# Altium PCB ALio MCU Breakout.PcbDoc
Units mm, origin at the board's own origin, x right, y up, seen from the top; angles counter-clockwise.
Board outline 23.11 x 61.85 mm, 2 copper layers (Top Layer, Bottom Layer); 2 components, 0 nets, 622 pads, 9 vias.
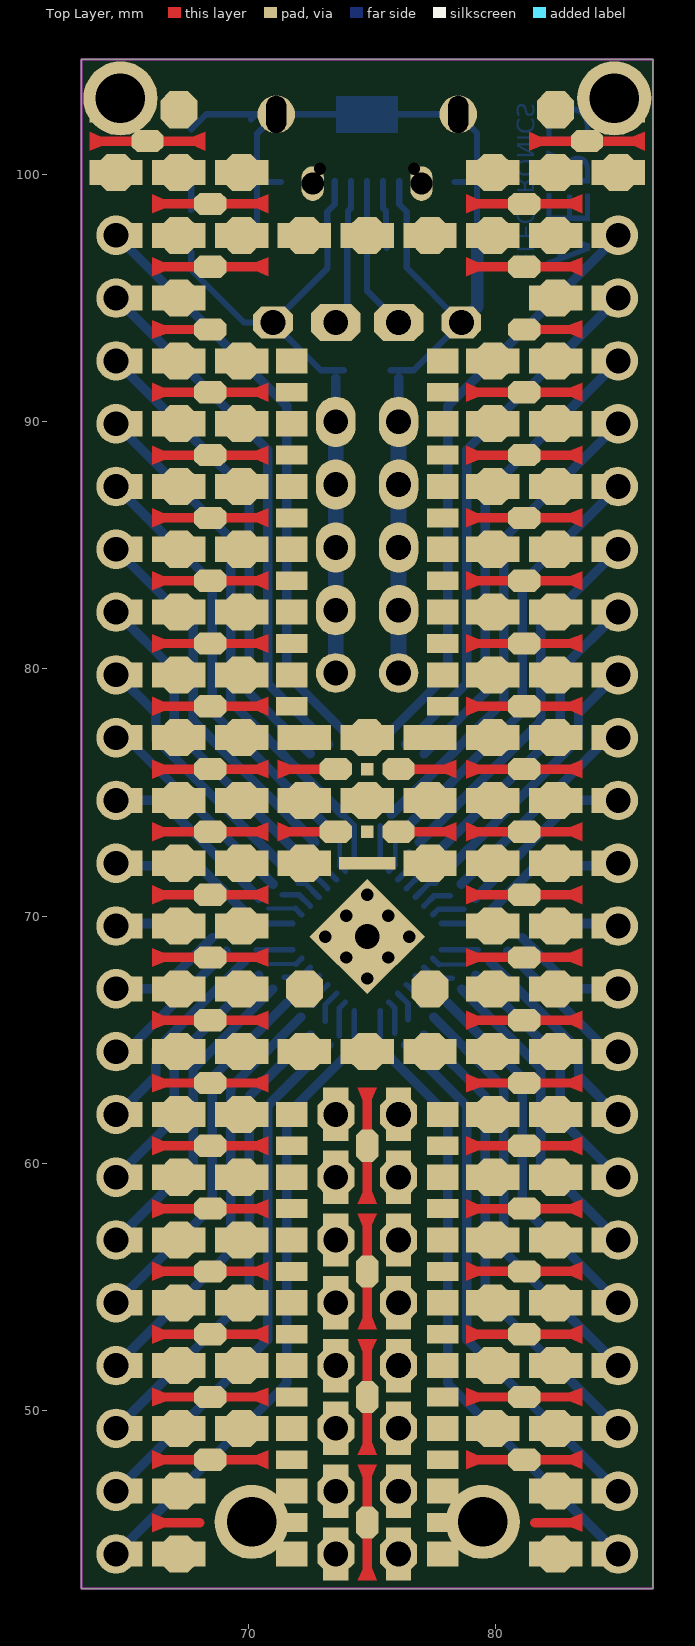
[diagram p0: Top Layer view]
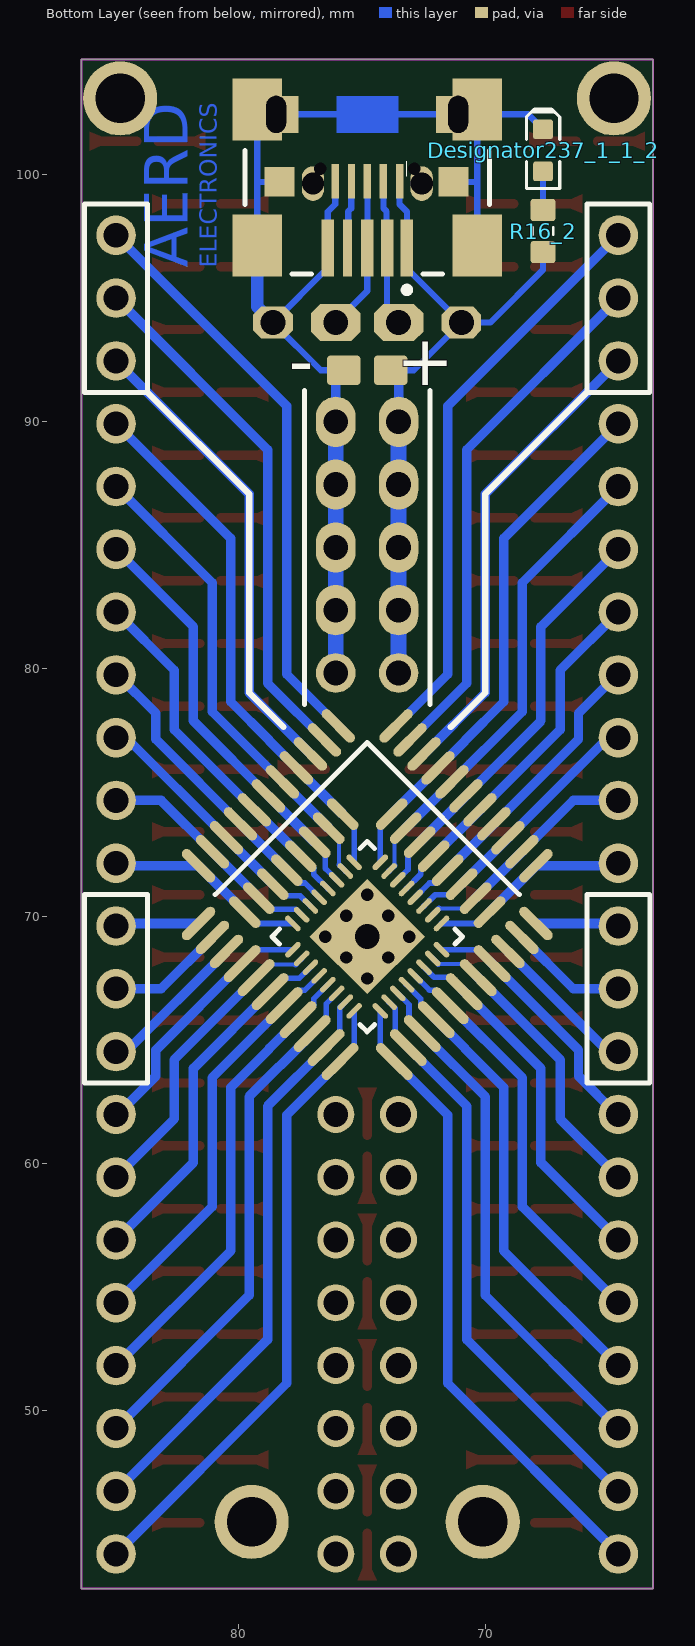
[diagram p1: Bottom Layer view, seen from below]

## Layer stack, top to bottom
Top Layer: signal copper 0.0356
Dielectric: dielectric 0.32, FR-4, Dk 4.8
Bottom Layer: signal copper 0.0356

## Board outline
86.36,104.648 63.246,104.648 63.246,42.799 86.36,42.799

## Design rules (kind name [scope] priority, off if disabled: settings)
Clearance [All] p1: gap=0.254
ComponentClearance [All] p1 off: gap=0.254 collisioncheckmode=3 verticalgap=0.254 showdistances=FALSE
HoleToHoleClearance [All] p1 off: gap=0.254 allowstackedmicrovias=TRUE
MinimumSolderMaskSliver [All] p1 off: minsoldermaskwidth=0.254
PolygonConnect [All] p1: connectstyle=Relief reliefconductorwidth=0.254 reliefentries=4 polygonreliefangle="90 Angle"
RoutingVias [All] p1: holewidth=0.711 width=1.27 viastyle="Through Hole" minholewidth=0.711 minwidth=1.27 maxholewidth=0.711 maxwidth=1.27
SilkToSilkClearance [All] p1 off: silktosilkclearance=0.254
SilkscreenOverComponentPads [All] p1: minsilkscreentomaskgap=0.254
SolderMaskExpansion [All] p1: expansion=0.102
Width [All] p1: maxlimit=1.27 minlimit=0.254 preferedwidth=0.508
23 further rules are at their usual default settings.

## Components (designator, comment, footprint, x,y, rotation, side; value= is the part's Value field where it differs from the comment)
Designator237_1_1_2 "Comment" LED-0603-RED 67.691,100.973 r90 bottom
R16_2 "Thick Film" 0603ESDA 67.691,97.71 r270 bottom (schematic designator R13)

## Footprints (in the part's own frame and the unit in brackets; to place one, negate y for a bottom-side part, rotate by r counter-clockwise, add the part's x,y. Pads: shape width x height; smd on the part's side, far side on the other; paste and mask are expansions set on the pad)
0603ESDA [mm] "Chip ESD suppressor, Body 1.6x0.8mm, 0603, IPC Medium Density"
  round 0.254 on Mech14: 0(0,0)
  rrect25% 0.9x1 smd: 1(-0.85,0) 2(0.85,0)
  Top Layer pour cut-out: -0.4,0.6 0.4,0.6 0.4,-0.6 -0.4,-0.6
  silkscreen extent -0.15,-0.41 0.15,0.41, body extent -0.85,-0.45 0.85,0.45, height 0.79
LED-0603-RED [mm]
  round 0.254 on Mech14: 0(0,0)
  rrect25% 0.8x0.8 smd: A(-0.85,0) K(0.85,0)
  Top Layer pour cut-out: -0.5,0.5 0.5,0.5 0.5,-0.5 -0.5,-0.5
  silkscreen extent -1.55,-0.67 1.68,0.67, body extent -0.8,-0.4 0.8,0.4, height 0.75

## Part data
R16_2: library part RES_240R_0805_1%, "Resistor SMD chip 240 Ohm 0.125W 1% 0805"

## Free pads (board coordinates)
  round 0.254 on Mech14: 0(74.803,92.078)
  round 1.6 hole 1: 1(64.643,69.596) 1(64.643,72.136) 1(73.533,79.832) 1(84.963,69.596) 1(84.963,72.136) 2(64.643,67.056) 2(64.643,74.676) 2(76.073,79.832) 2(84.963,67.056) 2(84.963,74.676) 3(64.643,64.516) 3(64.643,77.216) 3(84.963,64.516) 3(84.963,77.216) 4(64.643,61.976) 4(64.643,79.756) 4(84.963,61.976) 4(84.963,79.756) 5(64.643,59.436) 5(64.643,82.296) 5(84.963,59.436) 5(84.963,82.296) 6(64.643,56.896) 6(64.643,84.836) 6(84.963,56.896) 6(84.963,84.836) 7(64.643,54.356) 7(64.643,87.376) 7(84.963,54.356) 7(84.963,87.376) 8(64.643,51.816) 8(64.643,89.916) 8(84.963,51.816) 8(84.963,89.916) 9(64.643,49.276) 9(64.643,92.456) 9(84.963,49.276) 9(84.963,92.456) 10(64.643,46.736) 10(64.643,94.996) 10(84.963,46.736) 10(84.963,94.996) 11(64.643,44.196) 11(64.643,97.536) 11(84.963,44.196) 11(84.963,97.536)
  oct 1.5x1.5 smd: 1(64.643,100.076) 1(67.183,102.616) 1(69.723,49.276) 1(69.723,51.816) 1(69.723,54.356) 1(69.723,56.896) 1(69.723,59.436) 1(69.723,61.976) 1(69.723,64.516) 1(69.723,67.056) 1(69.723,69.596) 1(69.723,72.136) 1(69.723,74.676) 1(69.723,77.216) 1(69.723,79.756) 1(69.723,82.296) 1(69.723,84.836) 1(69.723,87.376) 1(69.723,89.916) 1(69.723,92.456) 1(69.723,97.536) 1(69.723,100.076) 1(73.533,46.736) 1(73.533,51.816) 1(73.533,56.896) 1(73.533,61.976) 1(74.803,64.516) 1(74.803,74.676) 1(74.803,77.216) 1(74.803,97.536) 1(76.073,46.736) 1(76.073,51.816) 1(76.073,56.896) 1(76.073,61.976) 1(82.423,44.196) 1(82.423,46.736) 1(82.423,49.276) 1(82.423,51.816) 1(82.423,54.356) 1(82.423,56.896) 1(82.423,59.436) 1(82.423,61.976) 1(82.423,64.516) 1(82.423,67.056) 1(82.423,69.596) 1(82.423,72.136) 1(82.423,74.676) 1(82.423,77.216) 1(82.423,79.756) 1(82.423,82.296) 1(82.423,84.836) 1(82.423,87.376) 1(82.423,89.916) 1(82.423,92.456) 1(82.423,94.996) 1(82.423,97.536) 1(82.423,100.076) 1(84.963,100.076) 1(84.963,102.616) 2(64.643,102.616) 2(67.183,44.196) 2(67.183,46.736) 2(67.183,49.276) 2(67.183,51.816) 2(67.183,54.356) 2(67.183,56.896) 2(67.183,59.436) 2(67.183,61.976) 2(67.183,64.516) 2(67.183,67.056) 2(67.183,69.596) 2(67.183,72.136) 2(67.183,74.676) 2(67.183,77.216) 2(67.183,79.756) 2(67.183,82.296) 2(67.183,84.836) 2(67.183,87.376) 2(67.183,89.916) 2(67.183,92.456) 2(67.183,94.996) 2(67.183,97.536) 2(67.183,100.076) 2(72.263,64.516) 2(72.263,67.056) 2(72.263,72.136) 2(72.263,74.676) 2(72.263,97.536) 2(73.533,44.196) 2(73.533,49.276) 2(73.533,54.356) 2(73.533,59.436) 2(76.073,44.196) 2(76.073,49.276) 2(76.073,54.356) 2(76.073,59.436) 2(77.343,64.516) 2(77.343,67.056) 2(77.343,72.136) 2(77.343,74.676) 2(77.343,97.536) 2(79.883,49.276) 2(79.883,51.816) 2(79.883,54.356) 2(79.883,56.896) 2(79.883,59.436) 2(79.883,61.976) 2(79.883,64.516) 2(79.883,67.056) 2(79.883,69.596) 2(79.883,72.136) 2(79.883,74.676) 2(79.883,77.216) 2(79.883,79.756) 2(79.883,82.296) 2(79.883,84.836) 2(79.883,87.376) 2(79.883,89.916) 2(79.883,92.456) 2(79.883,97.536) 2(79.883,100.076) 2(82.423,102.616)
  rect 2.159x1.016 smd: 1(64.643,100.076) 1(69.723,49.276) 1(69.723,51.816) 1(69.723,54.356) 1(69.723,56.896) 1(69.723,59.436) 1(69.723,61.976) 1(69.723,64.516) 1(69.723,67.056) 1(69.723,69.596) 1(69.723,72.136) 1(69.723,74.676) 1(69.723,77.216) 1(69.723,79.756) 1(69.723,82.296) 1(69.723,84.836) 1(69.723,87.376) 1(69.723,89.916) 1(69.723,92.456) 1(69.723,97.536) 1(69.723,100.076) 1(74.803,64.516) 1(74.803,74.676) 1(74.803,77.216) 1(74.803,97.536) 1(82.423,44.196) 1(82.423,46.736) 1(82.423,49.276) 1(82.423,51.816) 1(82.423,54.356) 1(82.423,56.896) 1(82.423,59.436) 1(82.423,61.976) 1(82.423,64.516) 1(82.423,67.056) 1(82.423,69.596) 1(82.423,72.136) 1(82.423,74.676) 1(82.423,77.216) 1(82.423,79.756) 1(82.423,82.296) 1(82.423,84.836) 1(82.423,87.376) 1(82.423,89.916) 1(82.423,92.456) 1(82.423,94.996) 1(82.423,97.536) 1(82.423,100.076) 1(84.963,100.076) 1(84.963,102.616) 2(64.643,102.616) 2(67.183,44.196) 2(67.183,46.736) 2(67.183,49.276) 2(67.183,51.816) 2(67.183,54.356) 2(67.183,56.896) 2(67.183,59.436) 2(67.183,61.976) 2(67.183,64.516) 2(67.183,67.056) 2(67.183,69.596) 2(67.183,72.136) 2(67.183,74.676) 2(67.183,77.216) 2(67.183,79.756) 2(67.183,82.296) 2(67.183,84.836) 2(67.183,87.376) 2(67.183,89.916) 2(67.183,92.456) 2(67.183,94.996) 2(67.183,97.536) 2(67.183,100.076) 2(72.263,64.516) 2(72.263,72.136) 2(72.263,74.676) 2(72.263,77.216) 2(72.263,97.536) 2(77.343,64.516) 2(77.343,72.136) 2(77.343,74.676) 2(77.343,77.216) 2(77.343,97.536) 2(79.883,49.276) 2(79.883,51.816) 2(79.883,54.356) 2(79.883,56.896) 2(79.883,59.436) 2(79.883,61.976) 2(79.883,64.516) 2(79.883,67.056) 2(79.883,69.596) 2(79.883,72.136) 2(79.883,74.676) 2(79.883,77.216) 2(79.883,79.756) 2(79.883,82.296) 2(79.883,84.836) 2(79.883,87.376) 2(79.883,89.916) 2(79.883,92.456) 2(79.883,97.536) 2(79.883,100.076)
  round 3 hole 2: 1(64.821,103.073) 1(70.129,45.491) 1(79.477,45.491) 1(84.797,103.073)
  oval 0.4x1.65 smd far side rot 45: 1(69.853,70.159) 2(70.419,70.725) 3(70.985,71.291) 4(71.55,71.856) 5(72.116,72.422) 6(72.682,72.988) 7(73.247,73.553) 8(73.813,74.119) 17(79.753,68.179) 18(79.187,67.614) 19(78.621,67.048) 20(78.056,66.482) 21(77.49,65.917) 22(76.924,65.351) 23(76.359,64.785) 24(75.793,64.22)
  oct 1.6x1.3 hole 1: 1(70.993,94.007) 4(78.613,94.007)
  rect 1.8x1.5 smd far side: 1(71.123,102.429) 1(78.487,102.429)
  rect 0.5x2.3 smd far side: 1(73.198,97.028) 2(73.998,97.028) 3(74.798,97.028) 5(76.398,97.028)
  rect 0.305x1.4 smd far side: 1(73.495,99.729) 2(74.145,99.729) 3(74.795,99.729) 5(76.095,99.729)
  rect 1.016x2.159 smd: 1(73.533,46.736) 1(73.533,51.816) 1(73.533,56.896) 1(73.533,61.976) 1(76.073,46.736) 1(76.073,51.816) 1(76.073,56.896) 1(76.073,61.976) 2(73.533,44.196) 2(73.533,49.276) 2(73.533,54.356) 2(73.533,59.436) 2(76.073,44.196) 2(76.073,49.276) 2(76.073,54.356) 2(76.073,59.436)
  oval 0.4x1.75 smd far side rot 135: 1(73.636,64.042) 2(73.071,64.608) 3(72.505,65.174) 4(71.939,65.739) 5(71.374,66.305) 6(70.808,66.871) 7(70.242,67.437) 8(69.676,68.002) 9(69.111,68.568) 10(68.545,69.134) 11(67.979,69.699) 23(75.97,77.69) 24(76.535,77.124) 25(77.101,76.558) 26(77.667,75.993) 27(78.232,75.427) 28(78.798,74.861) 29(79.364,74.295) 30(79.93,73.73) 31(80.495,73.164) 32(81.061,72.598) 33(81.627,72.033)
  rrect25% 1.35x1.2 smd far side: 1(73.853,92.078) 2(75.753,92.078)
  rect 2.286x0.508 smd: 1(74.803,72.136)
  rect 0.508x0.508 smd: 1(74.803,73.406) 1(74.803,75.946)
  round 1.5 hole 1: 1(76.073,61.976) 2(73.533,61.976) 3(76.073,59.436) 4(73.533,59.436) 5(76.073,56.896) 6(73.533,56.896) 7(76.073,54.356) 8(73.533,54.356) 9(76.073,51.816) 10(73.533,51.816) 11(76.073,49.276) 12(73.533,49.276) 13(76.073,46.736) 14(73.533,46.736) 15(76.073,44.196) 16(73.533,44.196)
  oval 0.229x0.8 smd far side rot 45: 1(77.808,68.639) 2(77.455,68.285) 3(77.101,67.932) 4(76.748,67.578) 5(76.394,67.225) 6(76.04,66.871) 7(75.687,66.518) 8(75.333,66.164) 17(71.798,69.7) 18(72.151,70.053) 19(72.505,70.407) 20(72.858,70.76) 21(73.212,71.114) 22(73.566,71.467) 23(73.919,71.821) 24(74.273,72.174)
  rect 1.524x1.016 smd: 2(64.96,44.196) 2(64.96,46.736) 2(64.96,49.276) 2(64.96,51.816) 2(64.96,54.356) 2(64.96,56.896) 2(64.96,59.436) 2(64.96,61.976) 2(64.96,64.516) 2(64.96,67.056) 2(64.96,69.596) 2(64.96,72.136) 2(64.96,74.676) 2(64.96,77.216) 2(64.96,79.756) 2(64.96,82.296) 2(64.96,84.836) 2(64.96,87.376) 2(64.96,89.916) 2(64.96,92.456) 2(64.96,94.996) 2(64.96,97.536) 2(84.645,44.196) 2(84.645,46.736) 2(84.645,49.276) 2(84.645,51.816) 2(84.645,54.356) 2(84.645,56.896) 2(84.645,59.436) 2(84.645,61.976) 2(84.645,64.516) 2(84.645,67.056) 2(84.645,69.596) 2(84.645,72.136) 2(84.645,74.676) 2(84.645,77.216) 2(84.645,79.756) 2(84.645,82.296) 2(84.645,84.836) 2(84.645,87.376) 2(84.645,89.916) 2(84.645,92.456) 2(84.645,94.996) 2(84.645,97.536)
  rect 1.27x1.016 smd: 2(71.755,44.196) 2(71.755,46.736) 2(71.755,49.276) 2(71.755,51.816) 2(71.755,54.356) 2(71.755,56.896) 2(71.755,59.436) 2(71.755,61.976) 2(71.755,79.756) 2(71.755,82.296) 2(71.755,84.836) 2(71.755,87.376) 2(71.755,89.916) 2(71.755,92.456) 2(77.851,44.196) 2(77.851,46.736) 2(77.851,49.276) 2(77.851,51.816) 2(77.851,54.356) 2(77.851,56.896) 2(77.851,59.436) 2(77.851,61.976) 2(77.851,79.756) 2(77.851,82.296) 2(77.851,84.836) 2(77.851,87.376) 2(77.851,89.916) 2(77.851,92.456)
  rect 1.27x0.762 smd: 2(71.755,45.466) 2(71.755,48.006) 2(71.755,50.546) 2(71.755,53.086) 2(71.755,55.626) 2(71.755,58.166) 2(71.755,60.706) 2(71.755,78.486) 2(71.755,81.026) 2(71.755,83.566) 2(71.755,86.106) 2(71.755,88.646) 2(71.755,91.186) 2(77.851,45.466) 2(77.851,48.006) 2(77.851,50.546) 2(77.851,53.086) 2(77.851,55.626) 2(77.851,58.166) 2(77.851,60.706) 2(77.851,78.486) 2(77.851,81.026) 2(77.851,83.566) 2(77.851,86.106) 2(77.851,88.646) 2(77.851,91.186)
  oct 2x1.5 hole 1: 2(73.533,94.007) 3(76.073,94.007)
  rrect50% 1.5x1.5 smd: 2(74.803,69.169)
  oct 1.3x0.9 smd: 3(65.913,101.346) 3(68.453,48.006) 3(68.453,50.546) 3(68.453,53.086) 3(68.453,55.626) 3(68.453,58.166) 3(68.453,60.706) 3(68.453,63.246) 3(68.453,65.786) 3(68.453,68.326) 3(68.453,70.866) 3(68.453,73.406) 3(68.453,75.946) 3(68.453,78.486) 3(68.453,81.026) 3(68.453,83.566) 3(68.453,86.106) 3(68.453,88.646) 3(68.453,91.186) 3(68.453,93.726) 3(68.453,96.266) 3(68.453,98.806) 3(73.533,73.406) 3(73.533,75.946) 3(76.073,73.406) 3(76.073,75.946) 3(81.153,48.006) 3(81.153,50.546) 3(81.153,53.086) 3(81.153,55.626) 3(81.153,58.166) 3(81.153,60.706) 3(81.153,63.246) 3(81.153,65.786) 3(81.153,68.326) 3(81.153,70.866) 3(81.153,73.406) 3(81.153,75.946) 3(81.153,78.486) 3(81.153,81.026) 3(81.153,83.566) 3(81.153,86.106) 3(81.153,88.646) 3(81.153,91.186) 3(81.153,93.726) 3(81.153,96.266) 3(81.153,98.806) 3(83.693,101.346)
  oval 1.6x2.032 hole 1: 3(73.533,82.372) 4(76.073,82.372) 5(73.533,84.912) 6(76.073,84.912) 7(73.533,87.452) 8(76.073,87.452) 9(73.533,89.992) 10(76.073,89.992)
  oct 0.9x1.3 smd: 3(74.803,45.466) 3(74.803,50.546) 3(74.803,55.626) 3(74.803,60.706)
  rect 0.279x1.4 smd far side: 4(75.445,99.729)
  rect 0.35x2.3 smd far side: 4(75.598,97.028)
  rect 2x2.5 smd far side: 6(79.248,97.128) 7(79.248,102.628) 8(70.348,97.128) 9(70.348,102.628)
  oval 0.229x0.8 smd far side rot 135: 9(74.273,66.164) 10(73.919,66.518) 11(73.566,66.871) 12(73.212,67.225) 13(72.858,67.578) 14(72.505,67.932) 15(72.151,68.285) 16(71.798,68.639) 25(75.333,72.174) 26(75.687,71.821) 27(76.04,71.467) 28(76.394,71.114) 29(76.748,70.76) 30(77.101,70.407) 31(77.455,70.053) 32(77.808,69.7)
  oval 0.4x1.65 smd far side rot 135: 9(75.793,74.119) 10(76.359,73.553) 11(76.924,72.988) 12(77.49,72.422) 13(78.056,71.856) 14(78.621,71.291) 15(79.187,70.725) 16(79.753,70.159) 25(73.813,64.22) 26(73.247,64.785) 27(72.682,65.351) 28(72.116,65.917) 29(71.55,66.482) 30(70.985,67.048) 31(70.419,67.614) 32(69.853,68.179)
  oval 0.4x1.75 smd far side rot 45: 12(67.979,72.033) 13(68.545,72.598) 14(69.111,73.164) 15(69.676,73.73) 16(70.242,74.295) 17(70.808,74.861) 18(71.374,75.427) 19(71.939,75.993) 20(72.505,76.558) 21(73.071,77.124) 22(73.636,77.69) 34(81.627,69.699) 35(81.061,69.134) 36(80.495,68.568) 37(79.93,68.002) 38(79.364,67.437) 39(78.798,66.871) 40(78.232,66.305) 41(77.667,65.739) 42(77.101,65.174) 43(76.535,64.608) 44(75.97,64.042)
  rect 3.3x3.3 smd far side rot 135: 33(74.803,69.169)
  rect 3.3x3.3 smd rot 45: 33(74.803,69.169)
  oval 0.9x1.4 hole 0.9 unplated: MH1(76.998,99.628) MH2(72.598,99.628)
  rect 0x0 smd: P1(76.131,99.689) P2(75.481,99.689) P3(74.831,99.689) P4(74.181,99.689) P5(73.531,99.689)
  round 1.524 hole 0.8 slot 1.5 at 90 deg: ""(71.123,102.429) ""(78.487,102.429)
  rect 1.2x1.2 smd far side: ""(71.313,99.697) ""(78.348,99.697)
  round 0.3 hole 0.5: ""(72.895,100.229) ""(76.695,100.229)

## Via types
v1: diameter 0.66, hole 0.5, Top Layer to Bottom Layer, tented top, 8 vias
v2: diameter 1.2, hole 1, Top Layer to Bottom Layer, tented top, 1 vias

## Nets (pads, with @x,y where several pads share a name; then routed paths per layer and width w, separated by ;. In a path a pad name is that pad's centre, name@x,y a point inside that pad or via, vN(x,y) a via of type N, cw(c..) or ccw(c..) an arc to the next point about the centre after c; other vN are vias at no path point)
pads on no net: Designator237_1_1_2.0 Designator237_1_1_2.A Designator237_1_1_2.K R16_2.0 R16_2.1 R16_2.2
copper on no net: | length 928.1
  Top Layer w0.381: 63.765,101.346 65.486,101.346 ; 66.305,45.466 68.026,45.466 ; 66.305,48.006 68.026,48.006 ; 66.305,50.546 68.026,50.546 ; 66.305,53.086 68.026,53.086 ; 66.305,55.626 68.026,55.626 ; 66.305,58.166 68.026,58.166 ; 66.305,60.706 68.026,60.706 ; 66.305,63.246 68.026,63.246 ; 66.305,65.786 68.026,65.786 ; 66.305,68.326 68.026,68.326 ; 66.305,70.866 68.026,70.866 ; 66.305,73.406 68.026,73.406 ; 66.305,75.946 68.026,75.946 ; 66.305,78.486 68.026,78.486 ; 66.305,81.026 68.026,81.026 ; 66.305,83.566 68.026,83.566 ; 66.305,86.106 68.026,86.106 ; 66.305,88.646 68.026,88.646 ; 66.305,91.186 68.026,91.186 ; 66.305,93.726 68.026,93.726 ; 66.305,96.266 68.026,96.266 ; 66.305,98.806 68.026,98.806 ; 66.34,101.346 68.061,101.346 ; 68.88,45.466 70.601,45.466 ; 68.88,48.006 70.601,48.006 ; 68.88,50.546 70.601,50.546 ; 68.88,53.086 70.601,53.086 ; 68.88,55.626 70.601,55.626 ; 68.88,58.166 70.601,58.166 ; 68.88,60.706 70.601,60.706 ; 68.88,63.246 70.601,63.246 ; 68.88,65.786 70.601,65.786 ; 68.88,68.326 70.601,68.326 ; 68.88,70.866 70.601,70.866 ; 68.88,73.406 70.601,73.406 ; 68.88,75.946 70.601,75.946 ; 68.88,78.486 70.601,78.486 ; 68.88,81.026 70.601,81.026 ; 68.88,83.566 70.601,83.566 ; 68.88,86.106 70.601,86.106 ; 68.88,88.646 70.601,88.646 ; 68.88,91.186 70.601,91.186 ; 68.88,96.266 70.601,96.266 ; 68.88,98.806 70.601,98.806 ; 71.385,73.406 73.106,73.406 ; 71.385,75.946 73.106,75.946 ; 74.803,43.318 74.803,45.039 ; 74.803,45.893 74.803,47.614 ; 74.803,48.398 74.803,50.119 ; 74.803,50.973 74.803,52.694 ; 74.803,53.478 74.803,55.199 ; 74.803,56.053 74.803,57.774 ; 74.803,58.558 74.803,60.279 ; 74.803,61.133 74.803,62.854 ; 76.5,73.406 78.221,73.406 ; 76.5,75.946 78.221,75.946 ; 79.005,45.466 80.726,45.466 ; 79.005,48.006 80.726,48.006 ; 79.005,50.546 80.726,50.546 ; 79.005,53.086 80.726,53.086 ; 79.005,55.626 80.726,55.626 ; 79.005,58.166 80.726,58.166 ; 79.005,60.706 80.726,60.706 ; 79.005,63.246 80.726,63.246 ; 79.005,65.786 80.726,65.786 ; 79.005,68.326 80.726,68.326 ; 79.005,70.866 80.726,70.866 ; 79.005,73.406 80.726,73.406 ; 79.005,75.946 80.726,75.946 ; 79.005,78.486 80.726,78.486 ; 79.005,81.026 80.726,81.026 ; 79.005,83.566 80.726,83.566 ; 79.005,86.106 80.726,86.106 ; 79.005,88.646 80.726,88.646 ; 79.005,91.186 80.726,91.186 ; 79.005,96.266 80.726,96.266 ; 79.005,98.806 80.726,98.806 ; 81.545,101.346 83.266,101.346 ; 81.58,45.466 83.301,45.466 ; 81.58,48.006 83.301,48.006 ; 81.58,50.546 83.301,50.546 ; 81.58,53.086 83.301,53.086 ; 81.58,55.626 83.301,55.626 ; 81.58,58.166 83.301,58.166 ; 81.58,60.706 83.301,60.706 ; 81.58,63.246 83.301,63.246 ; 81.58,65.786 83.301,65.786 ; 81.58,68.326 83.301,68.326 ; 81.58,70.866 83.301,70.866 ; 81.58,73.406 83.301,73.406 ; 81.58,75.946 83.301,75.946 ; 81.58,78.486 83.301,78.486 ; 81.58,81.026 83.301,81.026 ; 81.58,83.566 83.301,83.566 ; 81.58,86.106 83.301,86.106 ; 81.58,88.646 83.301,88.646 ; 81.58,91.186 83.301,91.186 ; 81.58,93.726 83.301,93.726 ; 81.58,96.266 83.301,96.266 ; 81.58,98.806 83.301,98.806 ; 84.12,101.346 85.841,101.346
  Bottom Layer w0.165: 70.792,70.305 71.9,70.305 ; 70.902,68.059 71.925,68.059 ; 73.693,72.047 73.693,73.071 ; 75.938,72.072 75.938,73.18 ; 77.706,68.034 78.814,68.034
  Bottom Layer w0.229: 70.313,68.639 71.798,68.639 ; 70.313,69.7 71.798,69.7 ; 71.374,70.861 72.051,70.861 72.505,70.407 ; 71.448,67.518 72.091,67.518 72.505,67.932 ; 71.9,70.305 72.151,70.053 ; 71.925,68.059 72.151,68.285 ; 72.024,67.003 72.283,67.003 72.858,67.578 ; 72.024,71.336 72.283,71.336 72.858,70.76 ; 72.636,66.391 72.636,66.649 73.212,67.225 ; 72.636,71.948 72.636,71.689 73.212,71.114 ; 73.111,65.74 73.111,66.417 73.566,66.871 ; 73.152,72.525 73.152,71.881 73.566,71.467 ; 73.668,65.159 73.668,66.266 73.919,66.518 ; 73.693,72.047 73.919,71.821 ; 74.273,64.679 74.273,66.164 ; 74.273,72.174 74.273,73.659 ; 75.333,64.679 75.333,66.164 ; 75.333,72.174 75.333,73.659 ; 75.687,66.518 75.913,66.292 75.913,65.268 ; 75.687,71.821 75.938,72.072 ; 76.04,66.871 76.454,66.458 76.454,65.814 ; 76.04,71.467 76.495,71.922 76.495,72.598 ; 76.394,67.225 76.97,66.649 76.97,66.391 ; 76.394,71.114 76.97,71.689 76.97,71.948 ; 76.748,67.578 77.323,67.003 77.582,67.003 ; 76.748,70.76 77.323,71.336 77.582,71.336 ; 77.101,67.932 77.555,67.478 78.232,67.478 ; 77.101,70.407 77.515,70.82 78.158,70.82 ; 77.455,68.285 77.706,68.034 ; 77.455,70.053 77.681,70.279 78.704,70.279 ; 77.808,68.639 79.293,68.639 ; 77.808,69.7 79.293,69.7
  Bottom Layer w0.254: 67.691,96.86 67.691,96.139 69.823,94.007 70.993,94.007 ; 67.691,98.56 67.691,100.123 ; 67.691,101.823 68.297,102.429 71.123,102.429 70.348,101.654 70.348,97.128 ; 69.853,70.159 70.313,69.7 ; 70.104,102.235 70.298,102.429 78.487,102.429 79.248,101.669 79.248,97.128 ; 70.348,99.695 71.311,99.695 71.313,99.697 ; 73.192,97.028 73.192,98.492 73.495,98.795 73.495,99.729 ; 73.198,97.028 73.198,96.212 70.993,94.007 ; 73.533,94.007 73.998,94.472 73.998,97.028 ; 73.813,74.119 74.273,73.659 ; 73.853,92.078 72.922,92.078 70.993,94.007 ; 74.024,97.06 74.024,98.502 74.145,98.624 74.145,99.729 ; 74.795,99.729 74.795,97.036 ; 74.798,97.028 74.798,95.282 76.073,94.007 ; 75.445,99.729 75.445,98.624 75.566,98.502 75.566,97.06 75.598,97.028 ; 75.753,92.078 76.684,92.078 78.613,94.007 76.398,96.222 76.398,97.028 76.398,98.492 76.095,98.795 76.095,99.729 ; 78.74,99.695 78.738,99.697 78.348,99.697 78.35,99.695 79.248,99.695 ; 74.795,97.036 74.803,97.028 74.795,97.036
  Bottom Layer w0.279: 73.493,90.032 73.533,89.992 ; 76.073,89.992 76.093,90.012
  Bottom Layer w0.381: 64.643,44.196 71.547,51.1 71.547,61.953 73.813,64.22 ; 64.643,46.736 70.775,52.868 70.775,62.312 73.247,64.785 ; 64.643,49.276 70.028,54.661 70.028,62.697 72.505,65.174 ; 64.643,51.816 69.281,56.454 69.281,63.066 70.848,64.633 70.848,64.649 72.116,65.917 ; 64.643,54.356 68.534,58.247 68.534,63.466 71.55,66.482 ; 64.643,56.896 67.775,60.028 67.775,63.838 70.985,67.048 ; 64.643,59.436 67,61.793 67,64.195 70.419,67.614 ; 64.643,61.976 64.706,61.976 66.256,63.525 66.256,64.582 69.853,68.179 ; 64.643,64.516 65.059,64.516 69.111,68.568 ; 64.643,67.056 66.468,67.056 68.545,69.134 ; 64.643,74.676 66.468,74.676 68.545,72.598 ; 64.643,77.216 65.059,77.216 69.111,73.164 ; 64.643,79.756 64.706,79.756 66.256,78.207 66.256,77.15 69.853,73.553 ; 64.643,82.296 67,79.939 67,77.537 70.419,74.118 ; 64.643,84.836 67.775,81.704 67.775,77.894 70.985,74.684 ; 64.643,87.376 68.534,83.485 68.534,78.266 71.55,75.25 ; 64.643,89.916 69.281,85.278 69.281,78.666 70.848,77.099 70.848,77.083 72.116,75.815 ; 64.643,92.456 70.028,87.071 70.028,79.035 72.505,76.558 ; 64.643,94.996 70.775,88.864 70.775,79.42 73.247,76.947 ; 64.643,97.536 71.547,90.632 71.547,79.779 73.813,77.512 ; 73.533,89.992 73.533,91.758 ; 75.793,64.22 78.059,61.953 78.059,51.1 84.963,44.196 ; 75.793,77.512 78.059,79.779 78.059,90.632 84.963,97.536 ; 76.073,89.992 76.073,91.758 ; 76.359,64.785 78.831,62.312 78.831,52.868 84.963,46.736 ; 76.359,76.947 78.831,79.42 78.831,88.864 84.963,94.996 ; 77.101,65.174 79.578,62.697 79.578,54.661 84.963,49.276 ; 77.101,76.558 79.578,79.035 79.578,87.071 84.963,92.456 ; 77.49,65.917 78.758,64.649 78.758,64.633 80.325,63.066 80.325,56.454 84.963,51.816 ; 77.49,75.815 78.758,77.083 78.758,77.099 80.325,78.666 80.325,85.278 84.963,89.916 ; 78.056,66.482 81.072,63.466 81.072,58.247 84.963,54.356 ; 78.056,75.25 81.072,78.266 81.072,83.485 84.963,87.376 ; 78.621,67.048 81.831,63.838 81.831,60.028 84.963,56.896 ; 78.621,74.684 81.831,77.894 81.831,81.704 84.963,84.836 ; 79.187,67.614 82.606,64.195 82.606,61.793 84.963,59.436 ; 79.187,74.118 82.606,77.537 82.606,79.939 84.963,82.296 ; 79.753,68.179 83.35,64.582 83.35,63.525 84.9,61.976 84.963,61.976 ; 79.753,73.553 83.35,77.15 83.35,78.207 84.9,79.756 84.963,79.756 ; 80.495,68.568 84.547,64.516 84.963,64.516 ; 80.495,73.164 84.547,77.216 84.963,77.216 ; 81.061,69.134 83.138,67.056 84.963,67.056 ; 81.061,72.598 83.138,74.676 84.963,74.676
  Bottom Layer w0.4: 64.643,69.596 64.746,69.699 67.979,69.699 ; 68.545,72.598 70.419,70.725 ; 69.111,73.164 70.984,71.291 ; 69.677,73.73 71.55,71.856 ; 69.853,70.159 67.98,72.033 64.746,72.033 ; 70.242,74.295 72.116,72.422 ; 70.808,74.861 72.682,72.988 ; 71.374,75.427 73.247,73.553 ; 71.94,75.993 73.813,74.119 ; 75.793,74.119 77.666,75.993 ; 76.359,73.553 78.232,75.427 ; 76.924,72.988 78.798,74.861 ; 77.49,72.422 79.364,74.295 ; 78.056,71.856 79.929,73.73 ; 78.621,71.291 80.495,73.164 ; 79.187,70.725 81.061,72.598 ; 79.753,70.159 81.626,72.033 84.86,72.033 ; 81.627,69.699 84.86,69.699 ; 64.746,72.033 64.643,72.136 64.746,72.033 ; 84.86,69.699 84.963,69.596 84.86,69.699 ; 84.86,72.033 84.963,72.136 84.86,72.033
  Bottom Layer w0.508: 78.613,94.007 79.248,94.642 79.248,97.128
  Bottom Layer w0.635: 73.533,79.832 73.533,89.992 ; 76.073,79.832 76.073,89.992
  other v1: 74.803,67.472 73.954,68.321 75.652,68.321 73.106,69.169 76.5,69.169 73.954,70.018 75.652,70.018 74.803,70.866
  other v2: 74.803,69.169

## Keep-outs
Keep-Out Layer:
  lines w0.076: 63.246,42.799 63.246,44.45 63.246,104.648 86.36,104.648 86.36,42.799 63.246,42.799

## Other copper
Top Layer:
  region: 71.869,73.406 71.194,73.406 71.194,73.787 71.691,73.571
  region: 71.869,73.406 71.194,73.406 71.194,73.024 71.697,73.223
  region: 77.737,73.406 78.412,73.406 78.412,73.025 77.915,73.241
  region: 77.737,73.406 78.412,73.406 78.412,73.788 77.909,73.589
  region: 77.737,75.946 78.412,75.946 78.412,75.565 77.915,75.781
  region: 77.737,75.946 78.412,75.946 78.412,76.328 77.909,76.129
  region: 71.869,75.946 71.194,75.946 71.194,76.327 71.691,76.111
  region: 71.869,75.946 71.194,75.946 71.194,75.564 71.697,75.763
  region: 67.577,101.346 68.252,101.346 68.252,101.728 67.749,101.529
  region: 67.577,101.346 68.252,101.346 68.252,100.965 67.754,101.181
  region: 64.249,101.346 63.574,101.346 63.574,100.964 64.077,101.163
  region: 64.249,101.346 63.574,101.346 63.574,101.727 64.072,101.511
  region: 85.357,101.346 86.032,101.346 86.032,101.728 85.529,101.529
  region: 85.357,101.346 86.032,101.346 86.032,100.965 85.534,101.181
  region: 82.029,101.346 81.354,101.346 81.354,100.964 81.857,101.163
  region: 82.029,101.346 81.354,101.346 81.354,101.727 81.852,101.511
  region: 66.789,98.806 66.114,98.806 66.114,99.187 66.611,98.971
  region: 66.789,98.806 66.114,98.806 66.114,98.424 66.617,98.623
  region: 70.117,98.806 70.792,98.806 70.792,98.425 70.294,98.641
  region: 70.117,98.806 70.792,98.806 70.792,99.188 70.289,98.989
  region: 79.489,98.806 78.814,98.806 78.814,99.187 79.311,98.971
  region: 79.489,98.806 78.814,98.806 78.814,98.424 79.317,98.623
  region: 82.817,98.806 83.492,98.806 83.492,98.425 82.995,98.641
  region: 82.817,98.806 83.492,98.806 83.492,99.188 82.989,98.989
  region: 82.817,96.266 83.492,96.266 83.492,96.648 82.989,96.449
  region: 82.817,96.266 83.492,96.266 83.492,95.885 82.995,96.101
  region: 79.489,96.266 78.814,96.266 78.814,95.884 79.317,96.083
  region: 79.489,96.266 78.814,96.266 78.814,96.647 79.311,96.431
  region: 82.817,93.726 83.492,93.726 83.492,94.108 82.989,93.909
  region: 82.817,93.726 83.492,93.726 83.492,93.345 82.995,93.561
  region: 82.817,91.186 83.492,91.186 83.492,91.568 82.989,91.369
  region: 82.817,91.186 83.492,91.186 83.492,90.805 82.995,91.021
  region: 79.489,91.186 78.814,91.186 78.814,90.804 79.317,91.003
  region: 79.489,91.186 78.814,91.186 78.814,91.567 79.311,91.351
  region: 82.817,88.646 83.492,88.646 83.492,89.028 82.989,88.829
  region: 82.817,88.646 83.492,88.646 83.492,88.265 82.995,88.481
  region: 79.489,88.646 78.814,88.646 78.814,88.264 79.317,88.463
  region: 79.489,88.646 78.814,88.646 78.814,89.027 79.311,88.811
  region: 82.817,86.106 83.492,86.106 83.492,86.488 82.989,86.289
  region: 82.817,86.106 83.492,86.106 83.492,85.725 82.995,85.941
  region: 79.489,86.106 78.814,86.106 78.814,85.724 79.317,85.923
  region: 79.489,86.106 78.814,86.106 78.814,86.487 79.311,86.271
  region: 82.817,83.566 83.492,83.566 83.492,83.948 82.989,83.749
  region: 82.817,83.566 83.492,83.566 83.492,83.185 82.995,83.401
  region: 79.489,83.566 78.814,83.566 78.814,83.184 79.317,83.383
  region: 79.489,83.566 78.814,83.566 78.814,83.947 79.311,83.731
  region: 82.817,81.026 83.492,81.026 83.492,81.408 82.989,81.209
  region: 82.817,81.026 83.492,81.026 83.492,80.645 82.995,80.861
  region: 79.489,81.026 78.814,81.026 78.814,80.644 79.317,80.843
  region: 79.489,81.026 78.814,81.026 78.814,81.407 79.311,81.191
  region: 82.817,78.486 83.492,78.486 83.492,78.868 82.989,78.669
  region: 82.817,78.486 83.492,78.486 83.492,78.105 82.995,78.321
  region: 79.489,78.486 78.814,78.486 78.814,78.104 79.317,78.303
  region: 79.489,78.486 78.814,78.486 78.814,78.867 79.311,78.651
  region: 82.817,45.466 83.492,45.466 83.492,45.848 82.989,45.649
  region: 82.817,45.466 83.492,45.466 83.492,45.085 82.995,45.301
  region: 79.489,45.466 78.814,45.466 78.814,45.084 79.317,45.283
  region: 79.489,45.466 78.814,45.466 78.814,45.847 79.311,45.631
  region: 82.817,48.006 83.492,48.006 83.492,48.388 82.989,48.189
  region: 82.817,48.006 83.492,48.006 83.492,47.625 82.995,47.841
  region: 79.489,48.006 78.814,48.006 78.814,47.624 79.317,47.823
  region: 79.489,48.006 78.814,48.006 78.814,48.387 79.311,48.171
  region: 82.817,50.546 83.492,50.546 83.492,50.928 82.989,50.729
  region: 82.817,50.546 83.492,50.546 83.492,50.165 82.995,50.381
  region: 79.489,50.546 78.814,50.546 78.814,50.164 79.317,50.363
  region: 79.489,50.546 78.814,50.546 78.814,50.927 79.311,50.711
  region: 82.817,53.086 83.492,53.086 83.492,53.468 82.989,53.269
  region: 82.817,53.086 83.492,53.086 83.492,52.705 82.995,52.921
  region: 79.489,53.086 78.814,53.086 78.814,52.704 79.317,52.903
  region: 79.489,53.086 78.814,53.086 78.814,53.467 79.311,53.251
  region: 82.817,55.626 83.492,55.626 83.492,56.008 82.989,55.809
  region: 82.817,55.626 83.492,55.626 83.492,55.245 82.995,55.461
  region: 79.489,55.626 78.814,55.626 78.814,55.244 79.317,55.443
  region: 79.489,55.626 78.814,55.626 78.814,56.007 79.311,55.791
  region: 82.817,58.166 83.492,58.166 83.492,58.548 82.989,58.349
  region: 82.817,58.166 83.492,58.166 83.492,57.785 82.995,58.001
  region: 79.489,58.166 78.814,58.166 78.814,57.784 79.317,57.983
  region: 79.489,58.166 78.814,58.166 78.814,58.547 79.311,58.331
  region: 82.817,60.706 83.492,60.706 83.492,61.088 82.989,60.889
  region: 82.817,60.706 83.492,60.706 83.492,60.325 82.995,60.541
  region: 79.489,60.706 78.814,60.706 78.814,60.324 79.317,60.523
  region: 79.489,60.706 78.814,60.706 78.814,61.087 79.311,60.871
  region: 82.817,63.246 83.492,63.246 83.492,63.628 82.989,63.429
  region: 82.817,63.246 83.492,63.246 83.492,62.865 82.995,63.081
  region: 79.489,63.246 78.814,63.246 78.814,62.864 79.317,63.063
  region: 79.489,63.246 78.814,63.246 78.814,63.627 79.311,63.411
  region: 82.817,65.786 83.492,65.786 83.492,66.168 82.989,65.969
  region: 82.817,65.786 83.492,65.786 83.492,65.405 82.995,65.621
  region: 79.489,65.786 78.814,65.786 78.814,65.404 79.317,65.603
  region: 79.489,65.786 78.814,65.786 78.814,66.167 79.311,65.951
  region: 82.817,68.326 83.492,68.326 83.492,68.708 82.989,68.509
  region: 82.817,68.326 83.492,68.326 83.492,67.945 82.995,68.161
  region: 79.489,68.326 78.814,68.326 78.814,67.944 79.317,68.143
  region: 79.489,68.326 78.814,68.326 78.814,68.707 79.311,68.491
  region: 82.817,70.866 83.492,70.866 83.492,71.248 82.989,71.049
  region: 82.817,70.866 83.492,70.866 83.492,70.485 82.995,70.701
  region: 79.489,70.866 78.814,70.866 78.814,70.484 79.317,70.683
  region: 79.489,70.866 78.814,70.866 78.814,71.247 79.311,71.031
  region: 82.817,73.406 83.492,73.406 83.492,73.788 82.989,73.589
  region: 82.817,73.406 83.492,73.406 83.492,73.025 82.995,73.241
  region: 79.489,73.406 78.814,73.406 78.814,73.024 79.317,73.223
  region: 79.489,73.406 78.814,73.406 78.814,73.787 79.311,73.571
  region: 82.817,75.946 83.492,75.946 83.492,76.328 82.989,76.129
  region: 82.817,75.946 83.492,75.946 83.492,75.565 82.995,75.781
  region: 79.489,75.946 78.814,75.946 78.814,75.564 79.317,75.763
  region: 79.489,75.946 78.814,75.946 78.814,76.327 79.311,76.111
  region: 66.789,96.266 66.114,96.266 66.114,96.647 66.611,96.431
  region: 66.789,96.266 66.114,96.266 66.114,95.884 66.617,96.083
  region: 70.117,96.266 70.792,96.266 70.792,95.885 70.294,96.101
  region: 70.117,96.266 70.792,96.266 70.792,96.648 70.289,96.449
  region: 66.789,93.726 66.114,93.726 66.114,93.344 66.617,93.543
  region: 66.789,93.726 66.114,93.726 66.114,94.107 66.611,93.891
  region: 66.789,91.186 66.114,91.186 66.114,91.567 66.611,91.351
  region: 66.789,91.186 66.114,91.186 66.114,90.804 66.617,91.003
  region: 70.117,91.186 70.792,91.186 70.792,90.805 70.294,91.021
  region: 70.117,91.186 70.792,91.186 70.792,91.568 70.289,91.369
  region: 70.117,88.646 70.792,88.646 70.792,89.028 70.289,88.829
  region: 70.117,88.646 70.792,88.646 70.792,88.265 70.294,88.481
  region: 66.789,88.646 66.114,88.646 66.114,88.264 66.617,88.463
  region: 66.789,88.646 66.114,88.646 66.114,89.027 66.611,88.811
  region: 66.789,86.106 66.114,86.106 66.114,86.487 66.611,86.271
  region: 66.789,86.106 66.114,86.106 66.114,85.724 66.617,85.923
  region: 70.117,86.106 70.792,86.106 70.792,85.725 70.294,85.941
  region: 70.117,86.106 70.792,86.106 70.792,86.488 70.289,86.289
  region: 70.117,83.566 70.792,83.566 70.792,83.948 70.289,83.749
  region: 70.117,83.566 70.792,83.566 70.792,83.185 70.294,83.401
  region: 66.789,83.566 66.114,83.566 66.114,83.184 66.617,83.383
  region: 66.789,83.566 66.114,83.566 66.114,83.947 66.611,83.731
  region: 66.789,81.026 66.114,81.026 66.114,81.407 66.611,81.191
  region: 66.789,81.026 66.114,81.026 66.114,80.644 66.617,80.843
  region: 70.117,81.026 70.792,81.026 70.792,80.645 70.294,80.861
  region: 70.117,81.026 70.792,81.026 70.792,81.408 70.289,81.209
  region: 70.117,78.486 70.792,78.486 70.792,78.868 70.289,78.669
  region: 70.117,78.486 70.792,78.486 70.792,78.105 70.294,78.321
  region: 66.789,78.486 66.114,78.486 66.114,78.104 66.617,78.303
  region: 66.789,78.486 66.114,78.486 66.114,78.867 66.611,78.651
  region: 66.789,75.946 66.114,75.946 66.114,76.327 66.611,76.111
  region: 66.789,75.946 66.114,75.946 66.114,75.564 66.617,75.763
  region: 70.117,75.946 70.792,75.946 70.792,75.565 70.294,75.781
  region: 70.117,75.946 70.792,75.946 70.792,76.328 70.289,76.129
  region: 70.117,73.406 70.792,73.406 70.792,73.788 70.289,73.589
  region: 70.117,73.406 70.792,73.406 70.792,73.025 70.294,73.241
  region: 66.789,73.406 66.114,73.406 66.114,73.024 66.617,73.223
  region: 66.789,73.406 66.114,73.406 66.114,73.787 66.611,73.571
  region: 66.789,70.866 66.114,70.866 66.114,71.247 66.611,71.031
  region: 66.789,70.866 66.114,70.866 66.114,70.484 66.617,70.683
  region: 70.117,70.866 70.792,70.866 70.792,70.485 70.294,70.701
  region: 70.117,70.866 70.792,70.866 70.792,71.248 70.289,71.049
  region: 70.117,68.326 70.792,68.326 70.792,68.708 70.289,68.509
  region: 70.117,68.326 70.792,68.326 70.792,67.945 70.294,68.161
  region: 66.789,68.326 66.114,68.326 66.114,67.944 66.617,68.143
  region: 66.789,68.326 66.114,68.326 66.114,68.707 66.611,68.491
  region: 66.789,65.786 66.114,65.786 66.114,66.167 66.611,65.951
  region: 66.789,65.786 66.114,65.786 66.114,65.404 66.617,65.603
  region: 70.117,65.786 70.792,65.786 70.792,65.405 70.294,65.621
  region: 70.117,65.786 70.792,65.786 70.792,66.168 70.289,65.969
  region: 70.117,48.006 70.792,48.006 70.792,48.388 70.289,48.189
  region: 70.117,48.006 70.792,48.006 70.792,47.625 70.294,47.841
  region: 66.789,48.006 66.114,48.006 66.114,47.624 66.617,47.823
  region: 66.789,48.006 66.114,48.006 66.114,48.387 66.611,48.171
  region: 66.789,45.466 66.114,45.466 66.114,45.847 66.611,45.631
  region: 66.789,45.466 66.114,45.466 66.114,45.084 66.617,45.283
  region: 70.117,45.466 70.792,45.466 70.792,45.085 70.294,45.301
  region: 70.117,45.466 70.792,45.466 70.792,45.848 70.289,45.649
  region: 70.117,53.086 70.792,53.086 70.792,53.468 70.289,53.269
  region: 70.117,53.086 70.792,53.086 70.792,52.705 70.294,52.921
  region: 66.789,53.086 66.114,53.086 66.114,52.704 66.617,52.903
  region: 66.789,53.086 66.114,53.086 66.114,53.467 66.611,53.251
  region: 66.789,50.546 66.114,50.546 66.114,50.927 66.611,50.711
  region: 66.789,50.546 66.114,50.546 66.114,50.164 66.617,50.363
  region: 70.117,50.546 70.792,50.546 70.792,50.165 70.294,50.381
  region: 70.117,50.546 70.792,50.546 70.792,50.928 70.289,50.729
  region: 70.117,58.166 70.792,58.166 70.792,58.548 70.289,58.349
  region: 70.117,58.166 70.792,58.166 70.792,57.785 70.294,58.001
  region: 66.789,58.166 66.114,58.166 66.114,57.784 66.617,57.983
  region: 66.789,58.166 66.114,58.166 66.114,58.547 66.611,58.331
  region: 66.789,55.626 66.114,55.626 66.114,56.007 66.611,55.791
  region: 66.789,55.626 66.114,55.626 66.114,55.244 66.617,55.443
  region: 70.117,55.626 70.792,55.626 70.792,55.245 70.294,55.461
  region: 70.117,55.626 70.792,55.626 70.792,56.008 70.289,55.809
  region: 74.803,43.802 74.803,43.127 74.422,43.127 74.638,43.624
  region: 74.803,43.802 74.803,43.127 75.185,43.127 74.986,43.63
  region: 74.803,47.13 74.803,47.805 75.184,47.805 74.968,47.307
  region: 74.803,47.13 74.803,47.805 74.421,47.805 74.62,47.302
  region: 74.803,52.21 74.803,52.885 74.421,52.885 74.62,52.382
  region: 74.803,52.21 74.803,52.885 75.184,52.885 74.968,52.387
  region: 74.803,48.882 74.803,48.207 75.185,48.207 74.986,48.71
  region: 74.803,48.882 74.803,48.207 74.422,48.207 74.638,48.704
  region: 74.803,57.29 74.803,57.965 74.421,57.965 74.62,57.462
  region: 74.803,57.29 74.803,57.965 75.184,57.965 74.968,57.468
  region: 74.803,53.962 74.803,53.287 75.185,53.287 74.986,53.79
  region: 74.803,53.962 74.803,53.287 74.422,53.287 74.638,53.785
  region: 74.803,62.37 74.803,63.045 74.421,63.045 74.62,62.542
  region: 74.803,62.37 74.803,63.045 75.184,63.045 74.968,62.547
  region: 74.803,59.042 74.803,58.367 75.185,58.367 74.986,58.87
  region: 74.803,59.042 74.803,58.367 74.422,58.367 74.638,58.864
  region: 70.117,60.706 70.792,60.706 70.792,61.088 70.289,60.889
  region: 70.117,60.706 70.792,60.706 70.792,60.325 70.294,60.541
  region: 66.789,60.706 66.114,60.706 66.114,60.324 66.617,60.523
  region: 66.789,60.706 66.114,60.706 66.114,61.087 66.611,60.871
  region: 66.789,63.246 66.114,63.246 66.114,63.627 66.611,63.411
  region: 66.789,63.246 66.114,63.246 66.114,62.864 66.617,63.063
  region: 70.117,63.246 70.792,63.246 70.792,62.865 70.294,63.081
  region: 70.117,63.246 70.792,63.246 70.792,63.628 70.289,63.429
Bottom Layer:
  region: 73.544,103.179 73.544,101.679 76.044,101.679 76.044,103.179
  pour cut-out: 74.403,91.278 75.203,91.278 75.203,92.878 74.403,92.878
  text "ELECTRONICS" at 80.637,96.221 h1.18 r270
  text "AERD" at 81.475,96.221 h3 r270

## Silkscreen, mask and mechanical layers (free items; w line width, h text height)
Bottom Overlay:
  circle w0.25: c73.198,95.328 r0.125
  lines w0.008: 73.195,99.93 73.195,100.529
  lines w0.2: 68.651,70.866 74.803,77.018 80.955,70.866 ; 69.848,98.778 69.848,100.978 ; 71.25,68.869 70.949,69.169 71.25,69.47 ; 71.748,95.978 72.548,95.978 ; 72.263,78.562 72.263,91.262 ; 74.502,65.616 74.803,65.316 75.104,65.616 ; 74.502,72.722 74.803,73.023 75.104,72.722 ; 77.048,95.978 77.848,95.978 ; 77.343,78.562 77.343,91.262 ; 78.356,68.869 78.657,69.169 78.356,69.47 ; 79.748,98.778 79.748,100.978 ; 63.373,70.866 63.373,63.246 65.913,63.246 65.913,70.866 ; 63.373,70.866 65.913,70.866 ; 63.373,70.866 65.913,70.866 ; 83.693,70.866 83.693,63.246 86.233,63.246 86.233,70.866 ; 83.693,70.866 86.233,70.866 ; 83.693,70.866 86.233,70.866 ; 63.373,91.186 63.373,98.806 65.913,98.806 65.913,91.186 63.373,91.186 ; 83.693,91.186 83.693,98.806 86.233,98.806 86.233,91.186 83.693,91.186
  lines w0.254: 65.913,91.186 70.028,87.071 70.028,79.035 71.42,77.643 ; 78.186,77.643 79.578,79.035 79.578,87.071 83.693,91.186
  text "+" at 71.29,91.473 h2.03
  text "-" at 76.957,91.473 h2.03
Top Paste:
  drawing of 307 lines, arcs and shapes, not listed
Bottom Paste:
  region: 73.544,103.179 73.544,101.679 76.044,101.679 76.044,103.179
Top Solder:
  drawing of 313 lines, arcs and shapes, not listed
Bottom Solder:
  region: 73.444,103.279 73.444,101.579 76.144,101.579 76.144,103.279
  rectangle: 73.279,98.933 76.327,100.584
  rectangle: 72.898,95.758 76.708,98.298
  region: 68.326,71.247 74.422,77.343 73.279,78.486 67.183,72.39
  region: 74.422,64.389 68.326,70.485 67.183,69.342 73.279,63.246
  region: 81.153,70.358 75.248,64.453 76.391,63.31 82.296,69.215
  region: 75.23,77.343 81.239,71.333 82.382,72.476 76.373,78.486
  region: 80.455,70.548 76.2,74.803 75.057,73.66 79.312,69.405
  region: 73.343,74.867 69.088,70.612 70.231,69.469 74.486,73.724
  region: 74.041,72.517 71.437,69.914 72.009,69.342 74.612,71.945
  region: 75.057,71.882 77.66,69.278 78.232,69.85 75.629,72.453
  region: 75.565,65.786 78.169,68.389 77.534,69.025 74.93,66.421
  region: 74.676,66.421 72.073,69.025 71.438,68.39 74.041,65.786
  text "AERD" at 81.475,96.221 h3 r270
Mechanical 2:
  lines w0.127: 70.895,99.579 70.895,104.579 78.695,104.579 78.695,99.579 70.895,99.579
Mechanical 13:
  circle w0.1: c74.803,65.068 r0.5
  circle w0.1: c71.126,69.169 r0.5
  circle w0.1: c77.172,69.169 r0.5
  lines w0.05: 73.778,91.828 73.878,91.828 ; 73.778,92.328 73.878,92.328 ; 73.878,91.578 73.778,91.578 73.778,92.578 73.878,92.578 ; 74.43,91.455 74.43,92.7 ; 75.728,91.578 75.828,91.578 75.828,92.578 75.728,92.578 ; 75.728,91.828 75.828,91.828 ; 75.728,92.328 75.828,92.328 ; 73.878,91.403 73.878,92.753 ; 73.878,91.403 73.93,91.455 ; 73.878,91.403 75.728,91.403 ; 73.878,92.753 73.93,92.7 ; 73.878,92.753 75.728,92.753 ; 73.93,91.455 73.93,92.7 ; 73.93,91.455 75.676,91.455 ; 73.93,92.7 75.676,92.7 ; 75.676,91.455 75.676,92.7 ; 75.676,91.455 75.728,91.403 ; 75.676,92.7 75.728,92.753 ; 75.728,91.403 75.728,92.753
  lines w0.1: 67.732,70.866 74.803,63.795 81.874,70.866 74.803,77.937 67.732,70.866 ; 69.853,69.169 74.803,74.119 79.753,69.169 74.803,64.22 69.853,69.169 ; 71.161,69.169 74.803,65.528 78.445,69.169 74.803,72.811 71.161,69.169
Mechanical 14:
  lines w0.1: 72.903,91.178 72.903,92.978 76.703,92.978 76.703,91.178 72.903,91.178
Mechanical 15:
  lines w0.1: 74.449,70.512 75.157,71.22 ; 74.449,71.22 75.157,70.512 ; 65.257,70.866 74.803,61.32 84.349,70.866 74.803,80.412 65.257,70.866 ; 67.378,69.169 74.803,76.594 82.228,69.169 74.803,61.745 67.378,69.169 ; 70.348,69.169 74.803,64.715 79.258,69.169 74.803,73.624 70.348,69.169 ; 74.449,68.816 75.157,69.523 74.449,68.816 ; 74.449,69.523 75.157,68.816 74.449,69.523